# Altium PCB S1-MAIN-20201205.PcbDoc
Units mm, origin at the board's own origin, x right, y up, seen from the top; angles counter-clockwise.
Board outline 53 x 104 mm, 2 copper layers (Top Layer, Bottom Layer); 102 components, 68 nets, 290 pads, 172 vias.
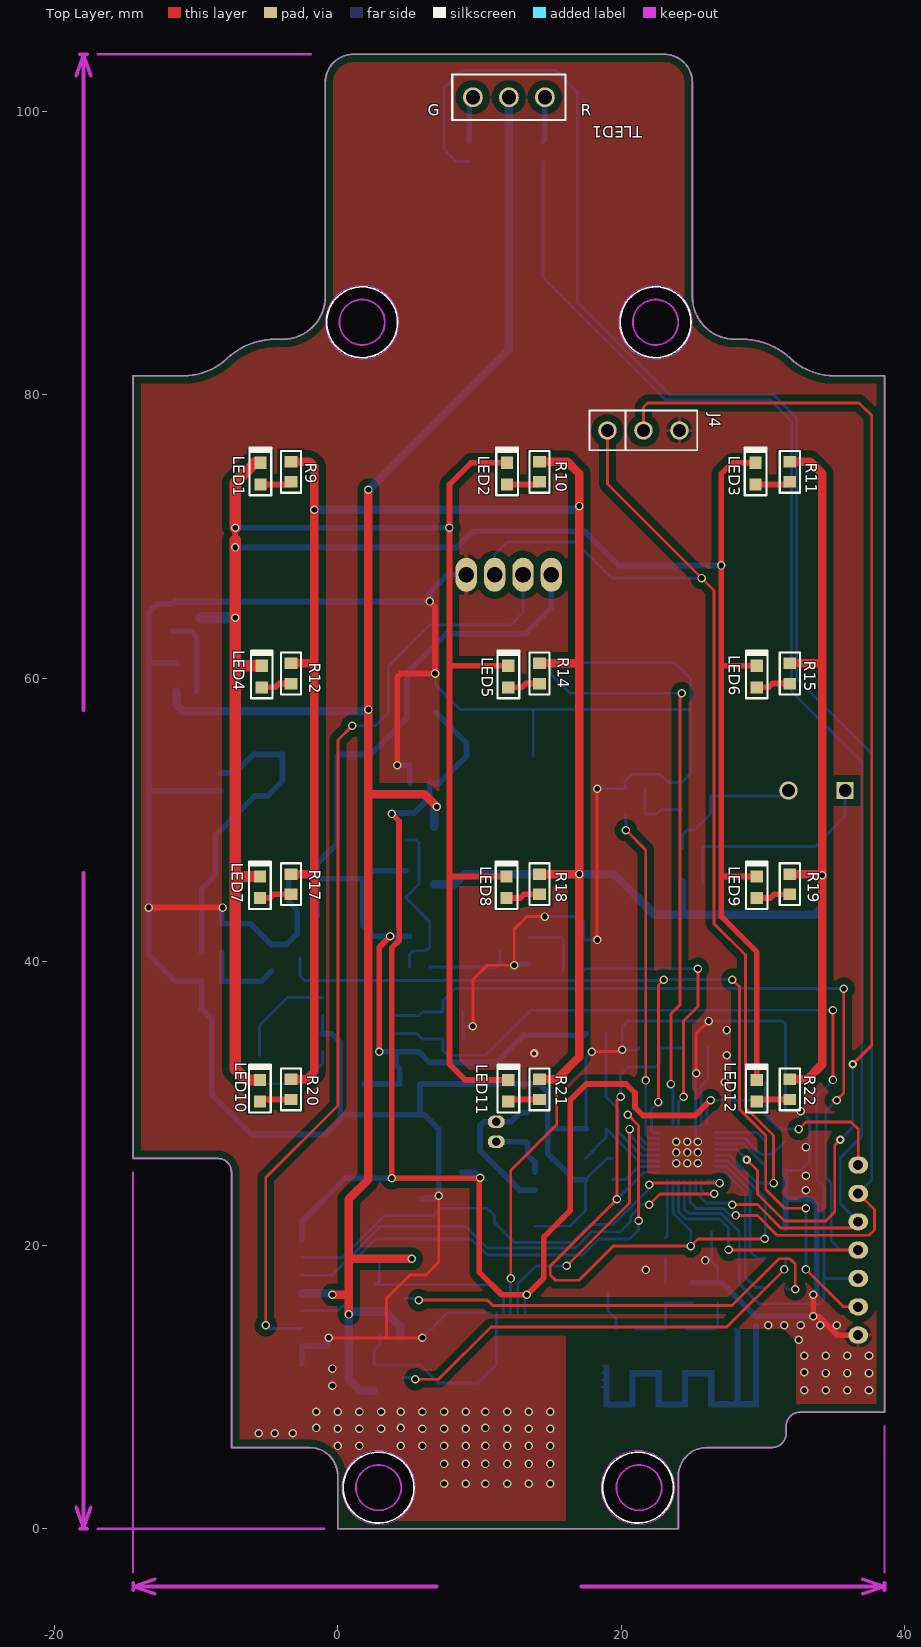
[diagram p0: Top Layer view]
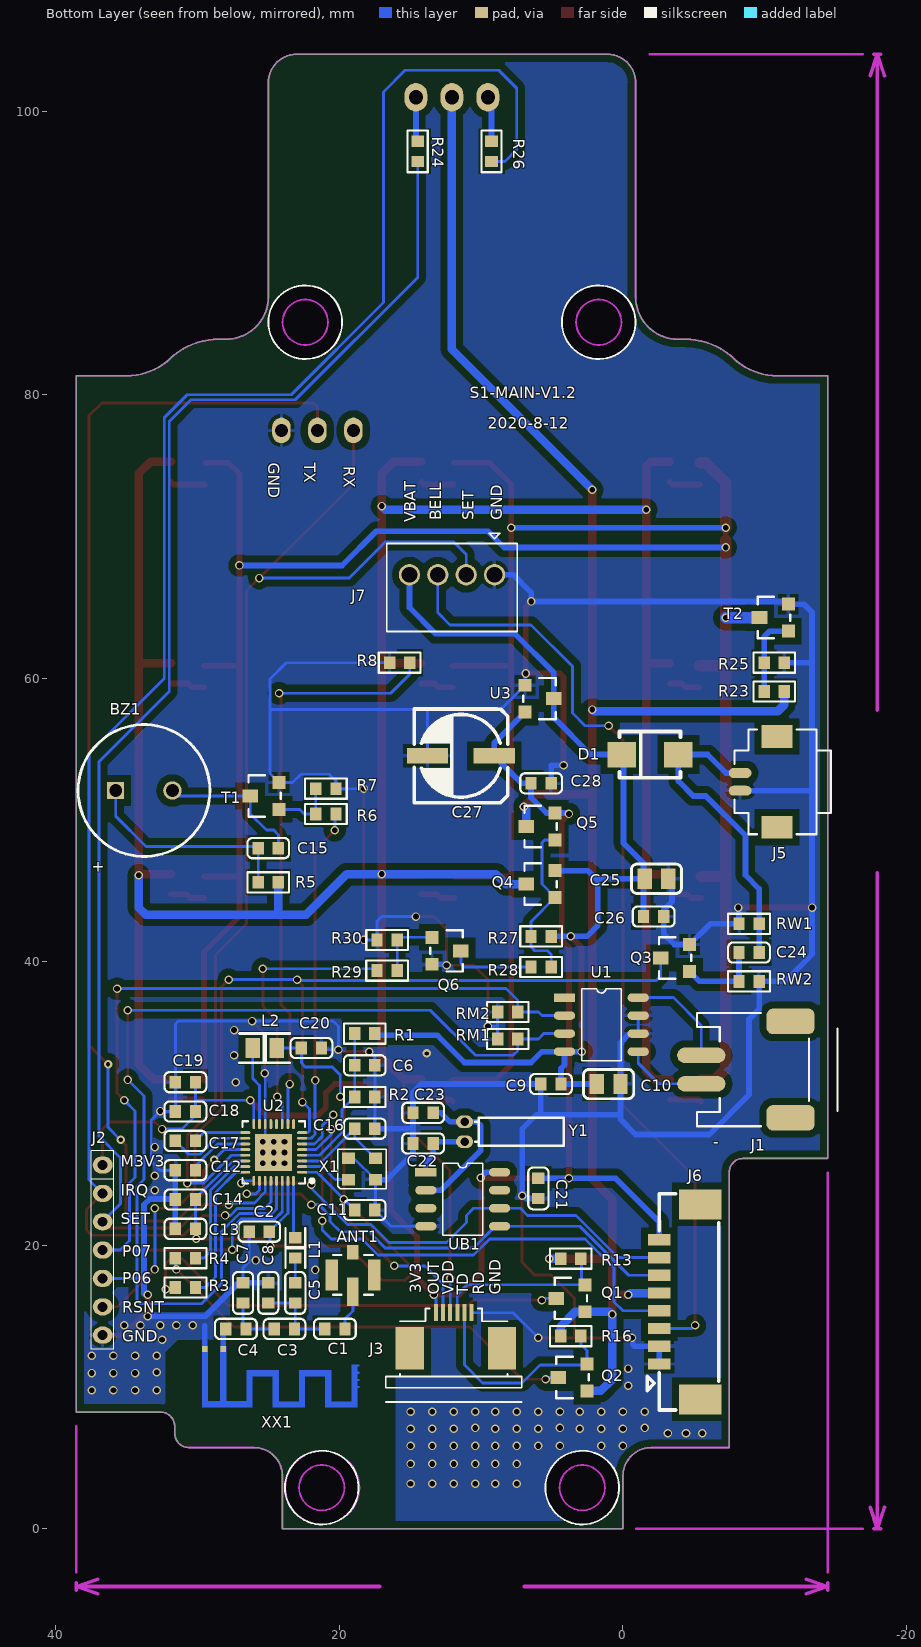
[diagram p1: Bottom Layer view, seen from below]
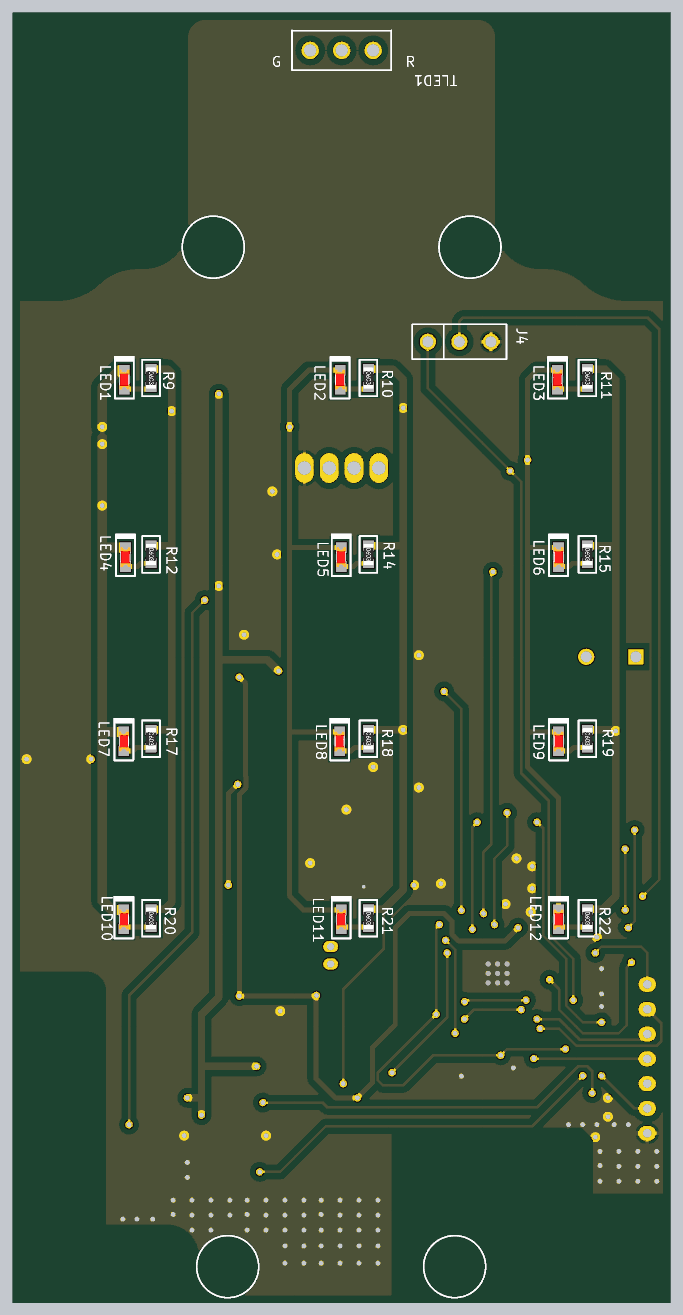
[diagram p2: 3D render of the assembled board from above, using the file's embedded part models]
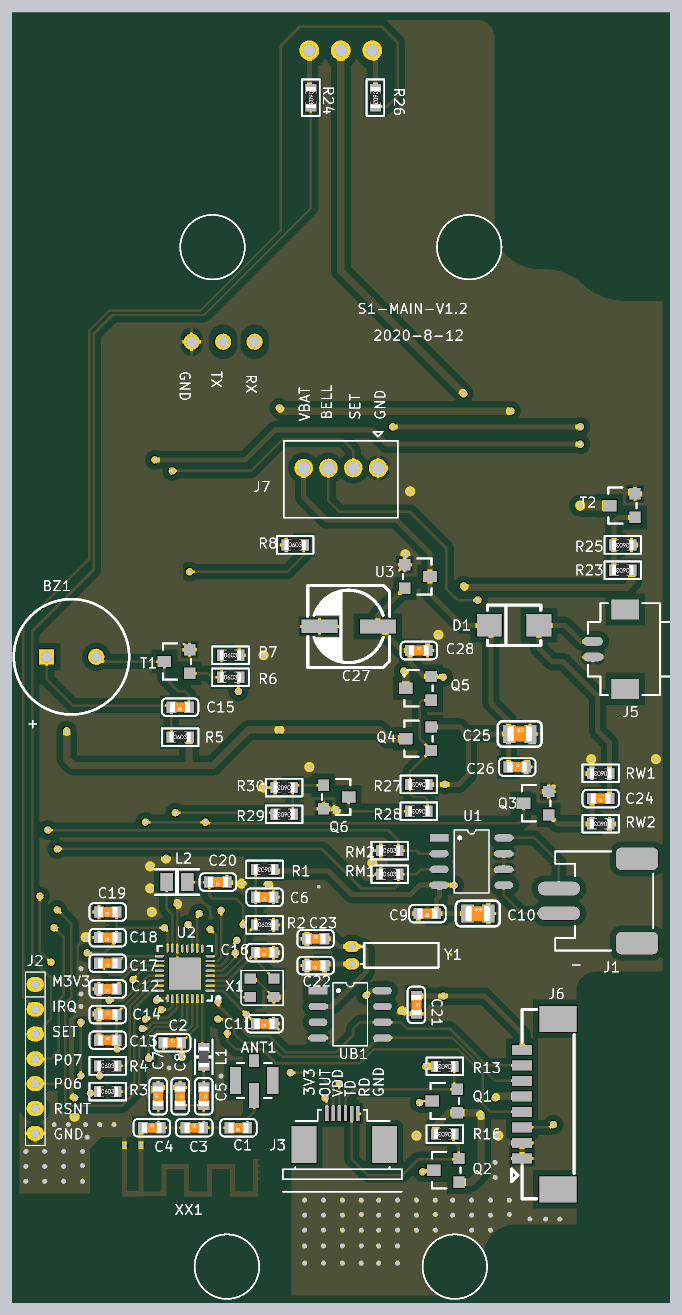
[diagram p3: 3D render of the assembled board from below, using the file's embedded part models]

## Layer stack, top to bottom
Top Layer: signal copper 0.0356
Dielectric: dielectric 0.32, FR-4, Dk 4.8
Bottom Layer: signal copper 0.0356

## Board outline
-7.5,5.727 -7.5,25.12 ccw(c-8.47,25.15) -8.44,26.12 -14.44,26.12 -14.44,81.325 -10.89,81.325 ccw(c-10.89,85.825) -7.809,82.544 cw(c-4.386,78.9) -4.386,83.9 -3.89,83.9 ccw(c-3.89,86.9) -0.89,86.9 -0.89,102 cw(c1.11,102) 1.11,104 23.01,104 cw(c23.01,102) 25.01,102 25.01,86.9 ccw(c28.01,86.9) 28.01,83.9 28.506,83.9 cw(c28.506,78.9) 31.929,82.544 ccw(c35.01,85.825) 35.01,81.325 38.56,81.325 38.56,8.227 32.62,8.227 ccw(c32.62,7.227) 31.62,7.227 31.62,6.727 cw(c30.62,6.727) 30.62,5.727 26.02,5.727 ccw(c26.02,3.727) 24.02,3.727 24.02,0 0,0 0,3.727 ccw(c-2,3.727) -2,5.727
cut-out: 25.01,85.1 ccw(c22.41,85.1) 22.41,87.7 ccw(c22.41,85.1) 19.81,85.1 ccw(c22.41,85.1) 22.41,82.5 ccw(c22.41,85.1)
cut-out: 4.31,85.1 ccw(c1.71,85.1) 1.71,87.7 ccw(c1.71,85.1) -0.89,85.1 ccw(c1.71,85.1) 1.71,82.5 ccw(c1.71,85.1)
cut-out: 23.772,2.899 ccw(c21.172,2.899) 21.172,5.499 ccw(c21.172,2.899) 18.572,2.899 ccw(c21.172,2.899) 21.172,0.299 ccw(c21.172,2.899)
cut-out: 5.473,2.899 ccw(c2.873,2.899) 2.873,5.499 ccw(c2.873,2.899) 0.273,2.899 ccw(c2.873,2.899) 2.873,0.299 ccw(c2.873,2.899)

## Design rules (kind name [scope] priority, off if disabled: settings)
Clearance [All] p1 off: gap=0.5
Clearance Clearance_1 [All] p2: gap=0.152
ComponentClearance [All] p1: gap=0 collisioncheckmode=3 verticalgap=0 showdistances=FALSE
HoleToHoleClearance [All] p1: gap=0 allowstackedmicrovias=TRUE
MinimumSolderMaskSliver [All] p1: minsoldermaskwidth=0
PolygonConnect PolygonConnect_1 [IsVia] p1: connectstyle=Direct reliefconductorwidth=0.254 reliefentries=4 polygonreliefangle="90 Angle" airgapwidth=0.254
PolygonConnect [All] p2: connectstyle=Relief reliefconductorwidth=0.254 reliefentries=4 polygonreliefangle="90 Angle" airgapwidth=0.254
RoutingVias [All] p1: holewidth=0.711 width=1.27 viastyle="Through Hole" minholewidth=0.3 minwidth=0.5 maxholewidth=0.711 maxwidth=1.27
ShortCircuit [All] p1: allowed=TRUE
SilkToSilkClearance [All] p1: silktosilkclearance=0
SilkToSolderMaskClearance SilkscreenOverComponentPads [IsPad] p1: minsilkscreentomaskgap=0 clearancetoexposedcopper=TRUE
SolderMaskExpansion [All] p1: expansion=0.102
Width [All] p1: maxlimit=2.032 minlimit=0.152 preferedwidth=0.254
22 further rules are at their usual default settings.

## Components (designator, comment, footprint, x,y, rotation, side; value= is the part's Value field where it differs from the comment)
ANT1 "ANT" ANT 19.05,17.907 r180 bottom
BZ1 "BUZZER" BUZZER_D93_L40 33.782,52.07 r180 bottom
C1 "NC_R0" 0603C 20.32,14.097 r0 bottom
C2 "1uF/6.3V" 0603C 25.654,20.955 r180 bottom
C3 "0R" 0603C 23.876,14.097 r180 bottom
C4 "0R" 0603C 27.305,14.097 r180 bottom
C5 "1.5pF" 0603C 23.114,16.637 r270 bottom
C6 "1nF" 0603C 18.214,32.69 r0 bottom
C7 "NC" 0603C 26.797,16.637 r90 bottom
C8 "1pF" 0603C 25.019,16.637 r270 bottom
C9 "0.1uF" 0603C 5.08,31.369 r0 bottom
C10 "22uF" 0805C 1.016,31.369 r180 bottom
C11 "0.1uF" 0603C 18.214,22.479 r0 bottom
C12 "0.1uF" 0603C 30.861,25.291 r0 bottom
C13 "1uF" 0603C 30.861,21.155 r180 bottom
C14 "0.1uF" 0603C 30.861,23.223 r180 bottom
C15 "10uF/10V" 0603C 25.019,48.006 r0 bottom
C16 "2.7pF" 0603C 18.214,28.219 r0 bottom
C17 "0.1uF" 0603C 30.861,27.359 r0 bottom
C18 "0.1uF" 0603C 30.861,29.428 r0 bottom
C19 "10uF/6.3V" 0603C 30.861,31.496 r0 bottom
C20 "10uF/6.3V" 0603C 21.971,33.909 r0 bottom
C21 "0.1uF" 0603C 5.969,24.003 r270 bottom
C22 "22pF" 0603C 14.097,27.178 r0 bottom
C23 "22pF" 0603C 14.097,29.337 r180 bottom
C24 "10uF/10V" 0603C -8.89,40.64 r0 bottom
C25 "10uF/16V" 0805C -2.362,45.847 r180 bottom
C26 "100nF" 0603C -2.159,43.18 r180 bottom
C27 "220uF/10V" CAP-SMD_6.3*5.8 11.43,54.518 r0 bottom
C28 "100nF" 0603C 5.775,52.578 r180 bottom
D1 "SS14" LC-SMAF_S1 -1.905,54.61 r180 bottom
J1 "电机接口" S2B-PH-SM3-TB -6.223,32.385 r90 bottom locked
J2 "7P" 7P-2.0MM 36.703,25.654 r270 bottom locked
J3 "指纹串口" 6P-0.5MM_1 11.938,15.24 r180 bottom locked
J4 "Header 3" 3P-2.54MM 19.013,77.47 r0 top
J5 "应急接口" 2P-1.25mm -8.26,52.685 r90 bottom locked
J6 "Header 8" 8P-1.25MM -4,16 r90 bottom
J7 "后板端口" JC20-4P 12.06,67.29 r180 bottom locked
L1 "2nH" 0603L 23.114,19.812 r90 bottom
L2 "4.7uH" 0805L 25.273,33.909 r0 bottom
LED1 "BLUE" 0603LED -5.461,74.422 r90 top locked
LED2 "BLUE" 0603LED 11.938,74.422 r90 top locked
LED3 "BLUE" 0603LED 29.464,74.422 r90 top locked
LED4 "BLUE" 0603LED -5.371,60.106 r90 top locked
LED5 "BLUE" 0603LED 12.028,60.106 r90 top locked
LED6 "BLUE" 0603LED 29.554,60.106 r90 top locked
LED7 "BLUE" 0603LED -5.498,45.247 r90 top locked
LED8 "BLUE" 0603LED 11.901,45.247 r90 top locked
LED9 "BLUE" 0603LED 29.554,45.247 r90 top locked
LED10 "BLUE" 0603LED -5.498,30.896 r90 top locked
LED11 "BLUE" 0603LED 12.028,30.896 r90 top locked
LED12 "BLUE" 0603LED 29.554,30.896 r90 top locked
Q1 "BSS123W" "SOT-23 - GDS" 3.683,16.256 r90 bottom
Q2 "BSS123W" "SOT-23 - GDS" 3.556,10.668 r90 bottom
Q3 "PMBT3904" "SOT-23 - BCE" -3.683,40.259 r90 bottom
Q4 "SI2301" "SOT-23 - GDS" 5.801,45.466 r90 bottom
Q5 "SI2301" "SOT-23 - GDS" 5.801,49.53 r90 bottom
Q6 "PMBT3904" "SOT-23 - BCE" 12.446,40.767 r270 bottom
R1 "510K%1" 0603R 18.214,34.925 r0 bottom
R2 "100K%1" 0603R 18.214,30.455 r180 bottom
R3 "10R" 0603R 30.861,17.018 r180 bottom
R4 "10R" 0603R 30.861,19.086 r180 bottom
R5 "10R" 0603R 25.019,45.593 r180 bottom
R6 "200R" 0603R 20.955,50.419 r180 bottom
R7 "10K" 0603R 20.955,52.197 r180 bottom
R8 "10K" 0603R 15.748,61.087 r180 bottom
R9 "560R" 0603R -3.302,74.549 r270 top
R10 "560R" 0603R 14.224,74.549 r270 top
R11 "560R" 0603R 31.877,74.549 r270 top
R12 "560R" 0603R -3.302,60.325 r270 top
R13 "10K" 0603R 3.683,19.05 r0 bottom
R14 "560R" 0603R 14.224,60.325 r270 top
R15 "560R" 0603R 31.877,60.325 r270 top
R16 "10K" 0603R 3.683,13.589 r0 bottom
R17 "560R" 0603R -3.302,45.466 r270 top
R18 "560R" 0603R 14.224,45.466 r270 top
R19 "560R" 0603R 31.877,45.466 r270 top
R20 "560R" 0603R -3.302,30.988 r270 top
R21 "560R" 0603R 14.224,30.988 r270 top
R22 "560R" 0603R 31.877,30.988 r270 top
R23 "1K" 0603R -10.668,59.055 r0 bottom
R24 "200R" LC-0603_R 14.478,97.155 r270 bottom
R25 "10K" 0603R -10.668,61.087 r0 bottom
R26 "200R" LC-0603_R 9.271,97.155 r270 bottom
R27 "100K" LC-0603_R 5.775,41.783 r0 bottom
R28 "1K" LC-0603_R 5.775,39.624 r0 bottom
R29 "4.7K" LC-0603_R 16.637,39.37 r0 bottom
R30 "10K" LC-0603_R 16.637,41.529 r0 bottom
RM1 "10K" 0603R 8.128,34.544 r180 bottom
RM2 "10K" 0603R 8.128,36.449 r180 bottom
RW1 "100K" LC-0603_R -8.89,42.672 r0 bottom
RW2 "100K" LC-0603_R -8.89,38.608 r0 bottom
T1 "SS8050" SOT-23-3L 25.273,51.689 r90 bottom
T2 "SS8050" SOT-23-3L -10.643,64.262 r90 bottom
TLED1 "F5" F5_DIP2 12.065,100.965 r180 top locked
U1 "CP2117" SOP8 1.524,35.56 r180 bottom
U2 "BK3431Q" QFN32_4*4*0.4 24.638,26.543 r0 bottom
U3 "HT7533-1" SOT-23-3L 5.894,58.547 r270 bottom
UB1 "PCF8563" SOP8 11.303,23.241 r180 bottom
X1 "16MHZ" XTAL3225 18.415,25.378 r180 bottom
XX1 "TIANX" BT_NAMI 28.189,12.68 r0 bottom locked
Y1 "32.768KHZ" 晶振-9 11.176,28.702 r270 bottom

## Footprints (in the part's own frame and the unit in brackets; to place one, negate y for a bottom-side part, rotate by r counter-clockwise, add the part's x,y. Pads: shape width x height; smd on the part's side, far side on the other; paste and mask are expansions set on the pad)
2P-1.25mm [mm]
  oval 0.7x1.6 smd mask+0.05: 1(-0.625,0) 2(0.625,0)
  rect 1.6x2.2 smd mask+0.05: 3(-3.2,-2.6) 4(3.2,-2.6)
  silkscreen extent -3.7,-6.4 3.7,0.4
3P-2.54MM [mm]
  round 1.3 / inner round 1.3 / far side oval 1.3x1.8 hole 0.9: 1(0,0) 2(2.54,0) 3(5.08,0)
  silkscreen extent -1.26,-1.4 6.34,1.4
6P-0.5MM_1 [mm]
  rect 0.28x1.2 smd: 1(-1.25,0) 2(-0.75,0) 3(-0.25,0) 4(0.25,0) 5(0.75,0) 6(1.25,0)
  rect 2x3 smd: 7(-3.1,-2.5) 8(3.4,-2.5)
  silkscreen extent -4.8,-6.3 4.8,0.3
7P-2.0MM [mm]
  oval 1.2x1.4 hole 0.7 mask+0.05: 1(0,0) 2(2,0) 3(4,0) 4(6,0) 5(8,0) 6(10,0) 7(12,0)
  silkscreen extent -1,-0.8 13,0.8
8P-1.25MM [mil]
  rect 31.5x63 smd: 1(-172.25,57.09) 2(-123.05,57.09) 3(-73.85,57.09) 4(-24.65,57.09) 5(24.65,57.09) 6(73.85,57.09) 7(123.05,57.09) 8(172.25,57.09)
  rect 82.68x118.11 smd: 9(-270.67,-57.08) 10(270.67,-57.08)
  silkscreen extent -300,-108 300,91
0603C [mm]
  rect 0.8x0.9 smd: 1(-0.711,0) 2(0.711,0)
  silkscreen extent -1.47,-0.71 1.47,0.71, body extent -0.8,-0.4 0.8,0.4, height 0.3
0603L [mm]
  rect 0.8x0.9 smd: 1(-0.711,0) 2(0.711,0)
  silkscreen extent -1.4,-0.7 1.4,0.7, body extent -0.82,-0.41 0.82,0.41, height 0.46
0603LED [mil]
  rect 34x34 smd: 1(-30,0) 2(30,0)
  silkscreen extent -60,-30 72,30, body extent -31,-16 31,16, height 24
0603R [mm]
  rect 0.8x0.9 smd: 1(-0.711,0) 2(0.711,0)
  silkscreen extent -1.47,-0.71 1.47,0.71, body extent -0.85,-0.4 0.85,0.4, height 0.56
0805C [mil]
  rect 40x56 smd: 1(-33,0) 2(33,0)
  silkscreen extent -70,-41 70,41, body extent -39,-25 39,25, height 30
0805L [mil]
  rect 40x56 smd: 1(-33,0) 2(33,0)
  silkscreen extent -70,-41 70,41
ANT [mm]
  rect 0.8x2 smd: 1(0,-1.2)
  rect 0.9x2.2 smd: 2(-1.5,0) 3(1.5,0)
  rect 0.8x1 smd: 4(0,1.6)
  silkscreen extent -1.4,-1.4 1.4,1.4
BT_NAMI [mm]
  rect 0.4x0.4 smd: 1(0,0) 2(1.3,0)
  Top Layer region: 1.5,-0.18 1.098,-0.18 1.098,4.116 1.5,4.116
  Top Layer region: 0.2,-0.197 -0.203,-0.197 -0.203,4.1 0.2,4.1
  Top Layer region: -2.05,3.703 -2.05,4.104 0.199,4.104 0.199,3.703
  Top Layer region: -1.651,1.512 -2.053,1.512 -2.053,4.101 -1.651,4.101
  Top Layer region: -0.208,3.695 -0.208,4.11 1.495,4.11 1.495,3.695
  Top Layer region: -3.899,1.51 -3.899,1.911 -1.65,1.911 -1.65,1.51
  Top Layer region: -3.5,1.512 -3.902,1.512 -3.902,4.101 -3.5,4.101
  Top Layer region: -5.751,3.704 -5.751,4.106 -3.502,4.106 -3.502,3.704
  Top Layer region: -7.609,1.506 -7.609,1.907 -5.359,1.907 -5.359,1.506
  Top Layer region: -5.35,1.51 -5.752,1.51 -5.752,4.103 -5.35,4.103
  Top Layer region: -7.202,1.51 -7.604,1.51 -7.604,4.106 -7.202,4.106
  Top Layer region: -9.45,3.704 -9.45,4.106 -7.201,4.106 -7.201,3.704
  Top Layer region: -9.048,1.106 -9.45,1.106 -9.45,4.108 -9.048,4.108
  Top Layer region: -9.574,1.732 -9.135,1.732 -9.135,1.619 -9.574,1.619
  Top Layer region: -9.573,2.239 -9.136,2.239 -9.136,2.126 -9.573,2.126
  Top Layer region: -9.571,2.745 -9.135,2.745 -9.135,2.632 -9.571,2.632
  Top Layer region: -9.578,1.22 -9.136,1.22 -9.136,1.107 -9.578,1.107
BUZZER_D93_L40 [mm]
  rect 1.2x1.2 hole 0.9: 1(-2,0)
  round 1.3 hole 0.9: 2(2,0)
  silkscreen extent -4.65,-4.65 4.65,4.65
CAP-SMD_6.3*5.8 [mm]
  rect 2.9x1.1 smd: 1(-2.35,0.005) 2(2.35,-0.005)
  silkscreen extent -3.3,-3.3 3.3,3.3
F5_DIP2 [mm]
  round 1.4 / inner oval 1.6x2 / far side oval 1.6x2 hole 1 mask+0.05: 1(0,0) 2(-2.54,0) 3(2.54,0)
  silkscreen extent -4,-1.6 4,1.6
JC20-4P [mm]
  round 1.5 / inner round 1.5 / far side oval 1.5x2.4 hole 1.1 mask+0.05: 1(3,0) 2(1,0) 3(-1,0) 4(-3,0)
  silkscreen extent -4.6,-4 4.6,2.92
LC-0603_R [mm]
  rect 0.8x0.9 smd: 1(-0.711,0) 2(0.711,0)
  silkscreen extent -1.47,-0.71 1.47,0.71, body extent -0.85,-0.4 0.85,0.4, height 0.56
LC-SMAF_S1 [mm]
  rect 2x1.8 smd: 1(2,0) 2(-2,0)
  silkscreen extent -2.15,-1.63 2.15,1.63
QFN32_4*4*0.4 [mm]
  rect 2.6x2.6 smd paste-0.025 mask+0.051: 0(0,0)
  oval 0.7x0.2 smd paste-0.025 mask+0.051: 1(-2,1.4) 2(-2,1) 3(-2,0.6) 4(-2,0.2) 5(-2,-0.2) 6(-2,-0.6) 7(-2,-1) 8(-2,-1.4) 17(2,-1.4) 18(2,-1) 19(2,-0.6) 20(2,-0.2) 21(2,0.2) 22(2,0.6) 23(2,1) 24(2,1.4)
  oval 0.2x0.7 smd paste-0.025 mask+0.051: 9(-1.4,-2) 10(-1,-2) 11(-0.6,-2) 12(-0.2,-2) 13(0.2,-2) 14(0.6,-2) 15(1,-2) 16(1.4,-2) 25(1.4,2) 26(1,2) 27(0.6,2) 28(0.2,2) 29(-0.2,2) 30(-0.6,2) 31(-1,2) 32(-1.4,2)
  silkscreen extent -2.82,-2.2 2.2,2.2
S2B-PH-SM3-TB [mm]
  oval 1.1x3.4 smd mask+0.05: 1(-1,0.7)
  oval 1.1x3.4 smd paste+0 mask+0.05: 2(1,0.7)
  rrect50% 1.8x3.4 smd mask+0.05: A(-3.4,-5.6) B(3.4,-5.6)
  silkscreen extent -4,-8.9 4,1
SOP8 [mm]
  rect 1.5x0.6 smd mask+0.05: 1(-2.6,1.905)
  oval 1.5x0.6 smd mask+0.05: 2(-2.6,0.635) 3(-2.6,-0.635) 4(-2.6,-1.905) 5(2.6,-1.905) 6(2.6,-0.635) 7(2.6,0.635) 8(2.6,1.905)
  round 0.4 on Bottom Overlay mask+0.05: ""(-0.949,1.905)
  silkscreen extent -1.4,-2.54 1.4,2.54
"SOT-23 - BCE" [mil]
  rect 36x36 smd: B(-37.4,-40) E(37.4,-40)
  rect 36x43.31 smd: C(0,40)
  silkscreen extent -57,-45 58,45
"SOT-23 - GDS" [mil]
  rect 36x43.31 smd: D(0,40)
  rect 36x36 smd: G(-37.4,-40) S(37.4,-40)
  silkscreen extent -57,-45 58,45
SOT-23-3L [mil]
  rect 36x36 smd: 1(-37.4,-40) 2(37.4,-40)
  rect 36x43.31 smd: 3(0,40)
  silkscreen extent -57,-45 58,45
XTAL3225 [mm]
  rect 0.9x0.8 smd: 1(-0.95,-0.75) 2(0.95,-0.75) 3(0.95,0.75) 4(-0.95,0.75)
  silkscreen extent -1.7,-1.4 1.7,1.4
晶振-9 [mm]
  oval 0.9x1.2 hole 0.6: 1(0,0) 2(1.4,0)
  rect 0x0 smd: 3(0.635,8)
  silkscreen extent -0.3,0.76 1.7,7

## Part data
ANT1: library part Socket, "Socket"
BZ1: "Buzzer"
C1 C2 C3 C4 C5 C7 C8 C11 C12 C13 C14 C16 C17 C18 C19 C20: library part Cap, "Capacitor"
C6 C9 C10 C24 C28: library part CAP-NP, "Capacitor, Ceramic"
C15: library part C_0_Dup1
C21 C22 C23: library part C
C25 C27: library part CAP-P, "Capacitor, tolerance ±20%"
C26: library part "CAP NP"
D1: library part D
J1: library part MHDR1X2, "Header, 2-Pin"
J3: library part "Header 6", "Header, 6-Pin"
J4: "Header, 3-Pin"
J5: library part "Header 2", "Header, 2-Pin"
J6: "Header, 8-Pin"
J7: library part "Header 4H", "Header, 4-Pin, Right Angle"
L1 L2: "Power Inductor, 4.7uH, 0.7A, 260mR DCR"
LED1 LED2 LED3 LED4 LED5 LED6 LED7 LED8 LED9 LED10 LED11 LED12: library part LED
Q1 Q2: library part BSS123L_0
Q4 Q5: library part PWRMOSFET_EP_DGS_0
R1 R2 R8: library part Res2, "Resistor"
R3 R4 R5 R6 R7: library part R_Dup1
R9 R10 R11 R12 R14 R15 R17 R18 R19 R20 R21 R22 R23 R24 R25 R26 R27 R28 R29 R30 RW1 RW2: library part R
R13 R16: library part RES
RM1 RM2: library part Pro71C3.TMP_UnNamed_1
T1 T2: library part NPN_BJT, "Bipolar Junction Transistor"
TLED1: library part WWXMFGLY
U1: library part AM24LC02_0
U3: library part XC6206P302M
UB1: library part IC8
Y1: library part 晶振

## Via types
v1: diameter 0.6, hole 0.4, Top Layer to Bottom Layer, 85 vias
v2: diameter 0.6, hole 0.4, Top Layer to Bottom Layer, tented both sides, 82 vias
v3: diameter 0.6, hole 0.3, Top Layer to Bottom Layer, 3 vias
v4: diameter 0.6, hole 0.3, Top Layer to Bottom Layer, tented both sides, 1 vias
v5: diameter 0.6, hole 0.4, Top Layer to Bottom Layer, tented bottom, 1 vias

## Nets (pads, with @x,y where several pads share a name; then routed paths per layer and width w, separated by ;. In a path a pad name is that pad's centre, name@x,y a point inside that pad or via, vN(x,y) a via of type N, cw(c..) or ccw(c..) an arc to the next point about the centre after c; other vN are vias at no path point)
ANT: ANT1.1 C1.1 | length 2.8
  Bottom Layer w0.2: ANT1.1 19.05,15.367 19.609,14.808 C1.1
BAT_ADC: C6.2 R1.2 R2.1 U2.4 | length 10.8
  Bottom Layer w0.2: R1.2 C6.2 R2.1 19.812,29.567 19.812,27.94 21.409,26.343 U2.4
BEEP: R6.2 U2.7 | length 24.2
  Top Layer w0.2: v1(20.32,49.276) 21.717,47.879 v1(21.717,31.623)
  Bottom Layer w0.2: R6.2 20.32,50.343 v1(20.32,49.276) ; v1(21.717,31.623) 21.717,27.813 21.987,27.543 U2.7
BELL: J6.3 J7.3 | length 67.5
  Top Layer w0.2: v1(-5.08,14.351) -5.08,24.765 0,29.845 0,55.626 v1(1.016,56.642)
  Bottom Layer w0.2: v1@-5.021,14.41 v1(-5.08,14.351) -4.853,14.124 J6.3 ; v1(1.016,56.642) 2.667,56.642 3.556,57.531 3.556,60.833 6.477,63.754 12.192,63.754 13.06,64.622 J7.3
GND: C2.1 C6.1 C7.2 C8.1 C9.2 C10.2 C11.1 C12.2 C13.1 C14.1 C16.1 C18.2 C19.2 C20.1 C21.2 C22.2 C23.1 C25.2 C26.2 C27.2 C28.2 J2.7 J3.6 J4.3 J5.1 J6.1 J6.2 J7.1 Q3.E Q6.E R2.2 R7.2 R8.1 R25.1 R30.2 RM1.1 RM2.1 RW1.2 RW2.1 T1.2 T2.2 U1.6 U1.7 U2.14 U3.1 UB1.4 X1.2 X1.4 XX1.2 | length 346.4
  Top Layer w0.2: v1(-0.635,13.462) 3.429,13.462 ; v1(5.969,13.462) 3.429,13.462 ; v1(7.112,23.495) 7.112,18.796 6.223,17.907 5.08,17.907 3.429,16.256 3.429,13.462 ; v1(9.525,35.433) 9.525,38.735 10.541,39.751 v1(12.446,39.751) 12.446,42.291 13.335,43.18 v1(14.605,43.18) ; v1(17.907,33.655) 19.939,33.655 v1(20.066,33.782) ; v1(18.288,41.529) v1(18.288,52.197) ; v1(25.273,32.131) 25.273,34.925 v1(26.162,35.814)
  Top Layer w0.4: v1(-13.335,43.815) v1(-8.128,43.815) ; v1(4.191,53.848) 4.191,60.071 4.445,60.325 v1(6.858,60.325) 6.858,65.024 v1(6.477,65.405) ; v1(33.528,16.51) v1(33.528,14.986) 33.909,14.986 35.241,13.654 J2.7
  Bottom Layer w0.2: U1.6 U1.7 ; v1@-0.687,13.41 v1(-0.635,13.462) ; v1(5.969,13.462) 7.747,15.24 J3.6 ; v1(6.858,60.325) 6.91,60.273 U3.1 8.622,57.785 13.843,57.785 ; v1(7.112,23.495) v1@7.112,23.622 ; RM1.1 8.839,35.433 ; RM2.1 8.839,35.433 ; v1(9.525,35.433) 8.839,35.433 ; C27.2 13.78,57.722 13.843,57.785 ; UB1.4 16.359,21.336 C11.1 17.465,22.516 X1.2 18.965,26.128 X1.4 ; v1(14.605,43.18) 17.018,43.18 17.348,42.85 R30.2 v1(18.288,41.529) ; R8.1 23.749,61.087 24.892,59.944 24.892,57.658 ; C16.1 R2.2 C6.1 17.502,33.25 v1(17.907,33.655) ; v1(18.288,52.197) R7.2 20.244,52.756 20.701,53.213 22.733,53.213 23.307,52.639 T1.2 24.892,53.274 24.892,57.658 ; C20.1 21.133,33.782 v1(20.066,33.782) 20.066,35.433 20.447,35.814 v1(26.162,35.814) 31.369,35.814 31.572,35.611 C19.2 C18.2 32.603,29.428 v1(32.639,29.464) 33.274,28.829 33.274,25.908 32.639,25.273 31.59,25.273 C12.2 ; v1(25.273,32.131) 25.238,32.096 U2.14 25.238,27.467 v2(25.4,27.305) ; C2.1 26.365,18.847 26.797,18.415 C7.2 ; 29.464,14.351 29.489,14.326 ; 29.464,14.986 29.489,14.961 ; 13.843,57.785 24.765,57.785 24.892,57.658
  Bottom Layer w0.4: R25.1 -13.335,61.087 ; J5.1 -13.335,52.06 ; v1(-8.128,43.815) -8.179,43.764 RW1.2 -6.162,42.672 Q3.E -3.622,41.209 -2.87,41.961 C26.2 -2.87,43.637 -3.454,44.221 C25.2@-3.454,45.72 ; J6.1 J6.2 -0.81,12.875 -0.687,12.997 v1@-0.687,13.41 ; U1.6 -0.457,34.925 0.178,34.29 C10.2 0.178,29.21 ; v1(4.191,53.848) 5.064,53.848 C28.2 ; C21.2 6.782,23.292 ; v1@7.112,23.622 7.112,28.194 6.096,29.21 5.791,29.21 ; J7.1 7.727,67.29 6.477,66.04 v1(6.477,65.405) -11.466,65.405 T2.2 -12.766,65.212 -13.335,64.643 -13.335,61.087 ; v1(12.446,39.751) 12.512,39.817 Q6.E ; X1.2 16.647,24.628 14.808,26.467 C22.2 14.808,28.258 ; C16.1 14.846,28.219 14.808,28.258 ; C8.1 C7.2 27.102,17.348 29.464,14.986 v1(33.528,14.986) ; XX1.2 29.489,14.326 ; C13.1 C14.1 ; C12.2 C14.1 ; v1(33.528,16.51) 33.711,16.51 33.782,16.581 33.782,22.86 33.384,23.258 31.608,23.258 C14.1 ; -13.335,52.06 v1(-13.335,43.815) -13.335,40.513 -11.43,38.608 RW2.1 -9.601,36.652 -8.89,35.941 -8.89,30.607 -6.096,27.813 -0.889,27.813 0.178,28.88 0.178,29.21 ; -13.335,52.06 -13.335,61.087 ; 0.178,29.21 5.791,29.21 ; 5.791,29.21 C9.2 14.224,31.369 14.808,30.785 C23.1 14.808,28.258
  other v1: 27.305,31.496 27.432,33.401 27.432,35.179
  other v2: 7.493,3.175 9.017,3.175 10.414,3.175 11.938,3.175 13.462,3.175 14.986,3.175 7.493,4.572 9.017,4.572 10.414,4.572 11.938,4.572 13.462,4.572 14.986,4.572 0,5.842 1.524,5.842 4.445,5.842 5.969,5.842 7.493,5.842 9.017,5.842 10.414,5.842 11.938,5.842 13.462,5.842 14.986,5.842 -5.588,6.731 -4.445,6.731 -3.175,6.731 0,7.048 1.524,7.048 3.048,7.048 5.969,7.048 7.493,7.048 9.017,7.048 11.938,7.048 13.462,7.048 14.986,7.048 -1.524,7.112 4.445,7.112 10.414,7.112 -1.524,8.255 0,8.255 1.524,8.255 3.048,8.255 4.445,8.255 5.969,8.255 7.493,8.255 9.017,8.255 10.414,8.255 11.938,8.255 13.462,8.255 14.986,8.255 32.893,9.779 34.417,9.779 35.941,9.779 37.465,9.779 -0.381,10.096 34.417,10.985 35.941,10.985 37.465,10.985 32.893,11.049 -0.381,11.303 32.893,12.192 34.417,12.192 35.941,12.192 37.465,12.192 30.353,14.351 31.496,14.351 32.639,14.351 34.036,14.351 35.179,14.351 21.717,18.253 25.908,18.923 33.02,23.876 33.02,24.892 23.876,25.781 24.638,25.781 25.4,25.781 23.876,26.543 24.638,26.543 25.4,26.543 33.02,26.924 23.876,27.305 24.638,27.305
  other v4: 13.843,33.528
  other v5: 32.512,13.335
INT_FP: J3.2 U2.5 | length 20.4
  Top Layer w0.2: v1(16.129,18.542) 20.574,22.987 v1(20.574,28.194)
  Bottom Layer w0.2: J3.2 12.688,17.26 13.97,18.542 v1(16.129,18.542) ; v1(20.574,28.194) 20.574,27.813 21.644,26.743 U2.5
IRQ_TSM12: J6.4 U2.6 | length 40.4
  Top Layer w0.2: v1(20.447,29.21) 21.209,28.448 v1(21.209,21.717)
  Bottom Layer w0.2: J6.4 0.007,15.374 0.635,16.002 0.635,18.415 2.667,20.447 9.398,20.447 10.541,19.304 17.272,19.304 18.415,20.447 20.574,20.447 21.209,21.082 v1(21.209,21.717) ; v1(20.447,29.21) 21.209,28.448 21.209,27.686 21.752,27.143 U2.6
M3V3: C18.1 C19.1 C21.1 C27.1 C28.1 J2.1 J3.1 J6.8 Q5.S U2.16 U3.2 UB1.8 | length 113.7
  Top Layer w0.2: v1(32.512,28.194) 33.02,28.702 36.195,28.702 36.703,28.194 J2.1
  Top Layer w0.4: v1(3.81,50.419) 4.318,49.911 4.318,42.453 4.335,42.435 4.335,41.513 3.81,40.987 v1(3.81,24.714) v1@9.982,24.714 ; v1(10.033,24.765) v1@9.982,24.714 ; v1(26.289,30.226) 25.208,29.145 21.528,29.145 20.955,29.718 20.955,30.734 20.32,31.369 17.526,31.369 16.383,30.226 16.383,22.426 14.534,20.577 14.534,17.709 v1(13.335,16.51) 11.557,16.51 9.982,18.085 v1@9.982,24.714
  Bottom Layer w0.2: J3.1 13.188,16.49 13.208,16.51 v1(13.335,16.51) ; U2.16 26.038,29.975 v1(26.289,30.226) 30.15,30.226 ; C19.1 30.15,30.226 ; v1(32.512,28.194) 31.115,28.194 30.15,29.159 C18.1 30.15,30.226
  Bottom Layer w0.4: J6.8 -2.55,21.656 0.508,24.714 v1(3.81,24.714) C21.1 ; v1(3.81,50.419) 3.871,50.48 Q5.S 5.395,50.48 6.487,51.572 C28.1 7.145,52.578 C27.1 9.08,55.427 U3.2 ; UB1.8 9.652,25.146 v1(10.033,24.765)
NetBZ1_1: BZ1.1 C15.2 R5.1 | length 15.2
  Bottom Layer w0.2: R5.1 C15.2 25.857,48.133 33.655,48.133 35.782,50.26 BZ1.1
NetBZ1_2: BZ1.2 C15.1 T1.3 | length 10.5
  Bottom Layer w0.2: C15.1 24.308,48.946 24.638,49.276 25.146,49.276 26.289,50.419 T1.3 31.401,51.689 BZ1.2
NetC1_2: C1.2 C3.2 C5.2 C8.2 | length 5.9
  Bottom Layer w0.2: C1.2 C3.2 23.114,14.148 C5.2 C8.2
NetC3_1: C3.1 C4.2 C7.1 | length 3.9
  Bottom Layer w0.2: C3.1 C4.2 26.797,14.3 C7.1
NetC4_1: C4.1 XX1.1 | length 1.5
  Bottom Layer w0.2: C4.1 C4.1@28.189,13.924
  Bottom Layer w0.4: XX1.1 C4.1@28.189,13.924
NetC5_1: C5.1 L1.1 | length 1.8
  Bottom Layer w0.2: C5.1 L1.1
NetC12_1: C12.1 U2.19 | length 4.5
  Bottom Layer w0.2: U2.19 28.61,27.143 30.15,25.603 C12.1
NetC16_2: C16.2 U2.3 X1.3 | length 7.4
  Bottom Layer w0.2: X1.3 18.925,27.587 C16.2 21.201,25.943 U2.3
NetC17_1: C17.1 U2.17 | length 3.8
  Bottom Layer w0.2: U2.17 29.566,27.943 C17.1
NetC17_2: C17.2 U2.18 | length 5.8
  Bottom Layer w0.2: U2.18 28.718,27.543 29.845,26.416 30.629,26.416 C17.2
NetC22_1: C22.1 UB1.1 Y1.2 | length 4.5
  Bottom Layer w0.4: Y1.2 13.262,27.302 C22.1 13.386,26.365 13.903,25.848 UB1.1
NetC23_2: C23.2 UB1.2 Y1.1 | length 10.5
  Bottom Layer w0.4: C23.2 12.827,29.337 12.192,28.702 Y1.1 10.287,28.702 10.033,28.448 10.033,26.67 12.827,23.876 UB1.2
NetC24_2: C24.2 Q3.B RW2.2 | length 5.8
  Bottom Layer w0.4: C24.2 RW2.2 -5.4,38.608 Q3.B
NetJ1_1: J1.1 U1.5 | length 5.9
  Bottom Layer w0.2: J1.1 -2.524,31.385 -1.076,32.833 U1.5
NetJ1_2: J1.2 U1.8 | length 7.4
  Bottom Layer w0.2: J1.2 -5.523,35.498 -3.556,37.465 U1.8
NetL1_2: L1.2 U2.32 | length 4.1
  Bottom Layer w0.2: L1.2 23.238,20.647 U2.32
NetL2_2: L2.2 U2.15 | length 5.6
  Bottom Layer w0.2: U2.15 25.638,31.277 26.111,31.75 L2.2
NetLED1_1: LED1.1 R9.2 | length 2.2
  Top Layer w0.4: LED1.1 -3.48,73.66 R9.2
NetLED1_2: LED1.2 LED2.2 LED3.2 LED4.2 LED5.2 LED6.2 LED7.2 LED8.2 LED9.2 LED10.2 LED11.2 LED12.2 T2.3 | length 213.2
  Top Layer w0.4: -7.366,67.945 -7.239,67.945 ; -7.239,69.596 -7.366,69.596 -7.239,69.723 v1(-7.239,70.612) ; LED8.2 7.909,46.009 7.874,45.974 ; LED2.2 9.398,75.184 7.874,73.66 v1(7.874,70.612) 7.874,60.96 ; LED11.2 8.982,31.658 7.874,32.766 7.874,45.974 ; LED5.2 7.966,60.868 7.874,60.96 ; LED3.2 27.813,75.184 27.051,74.422 v1(27.051,67.945) 27.051,60.833 ; LED12.2 29.554,40.677 27.051,43.18 27.051,45.847 ; LED9.2 27.213,46.009 27.051,45.847 ; LED6.2 27.086,60.868 27.051,60.833 ; 7.874,45.974 7.874,60.96 ; 27.051,45.847 27.051,60.833
  Top Layer w0.8: -7.239,69.723 -7.239,69.596 v1(-7.239,69.215) -7.239,67.945 v1(-7.239,64.262) -7.239,60.833 ; v1(-7.239,70.612) -7.239,73.787 -5.842,75.184 LED1.2 ; LED10.2 -6.477,31.658 -7.239,32.42 -7.239,45.847 ; LED7.2 -7.077,46.009 -7.239,45.847 ; LED4.2 -7.204,60.868 -7.239,60.833 ; -7.239,45.847 -7.239,60.833
  Bottom Layer w0.4: v1(-7.239,69.215) 8.382,69.215 9.525,70.358 17.399,70.358 19.812,67.945 v1(27.051,67.945) ; v1(-7.239,70.612) v1(7.874,70.612)
  Bottom Layer w0.8: T2.3 v1(-7.239,64.262)
NetLED2_1: LED2.1 R10.2 | length 2.4
  Top Layer w0.4: LED2.1 14.046,73.66 R10.2
NetLED3_1: LED3.1 R11.2 | length 2.5
  Top Layer w0.4: LED3.1 31.699,73.66 R11.2
NetLED4_1: LED4.1 R12.2 | length 2.2
  Top Layer w0.4: LED4.1 -4.41,59.344 -4.14,59.614 R12.2
NetLED5_1: LED5.1 R14.2 | length 2.3
  Top Layer w0.4: LED5.1 12.989,59.344 13.259,59.614 R14.2
NetLED6_1: LED6.1 R15.2 | length 2.4
  Top Layer w0.4: LED6.1 30.388,59.344 30.658,59.614 R15.2
NetLED7_1: LED7.1 R17.2 | length 2.3
  Top Layer w0.4: LED7.1 -4.791,44.485 -4.521,44.755 R17.2
NetLED8_1: LED8.1 R18.2 | length 2.4
  Top Layer w0.4: LED8.1 12.862,44.485 13.132,44.755 R18.2
NetLED9_1: LED9.1 R19.2 | length 2.4
  Top Layer w0.4: LED9.1 30.515,44.485 30.785,44.755 R19.2
NetLED10_1: LED10.1 R20.2 | length 2.3
  Top Layer w0.4: LED10.1 -5.355,30.277 R20.2
NetLED11_1: LED11.1 R21.2 | length 2.3
  Top Layer w0.4: LED11.1 12.171,30.277 R21.2
NetLED12_1: LED12.1 R22.2 | length 2.4
  Top Layer w0.4: LED12.1 29.697,30.277 R22.2
NetQ4_G: Q4.G Q5.G R27.2 R28.1 | length 12
  Bottom Layer w0.2: Q5.G 5.522,48.58 5.715,48.387 5.715,45.466 4.785,44.536 Q4.G 6.487,42.814 R27.2 6.487,41.031 6.223,40.767 5.334,40.767 5.064,40.497 R28.1
NetQ6_B: Q6.B R29.1 R30.1 | length 4.7
  Bottom Layer w0.2: Q6.B 15.738,41.717 R30.1 R29.1
NetQ6_C: Q6.C R28.2 | length 5.9
  Bottom Layer w0.2: R28.2 11.176,39.624 11.43,39.878 Q6.C
NetR3_2: R3.2 U2.24 | length 10.4
  Bottom Layer w0.2: U2.24 27.308,25.143 28.731,23.72 28.731,17.751 29.464,17.018 R3.2
NetR4_2: R4.2 U2.23 | length 8.7
  Bottom Layer w0.2: U2.23 27.416,25.543 29.083,23.876 29.083,19.558 29.555,19.086 R4.2
NetR6_1: R6.1 R7.1 T1.1 | length 4.5
  Bottom Layer w0.2: R7.1 R6.1 22.479,50.419 22.799,50.739 T1.1
NetR23_2: R23.2 R25.2 T2.1 | length 5.7
  Bottom Layer w0.4: T2.1 -10.353,63.312 -9.957,62.916 R25.2 R23.2
NetR24_1: R24.1 TLED1.2 | length 3.2
  Bottom Layer w0.4: R24.1 14.605,97.993 TLED1.2
NetR26_1: R26.1 TLED1.3 | length 3.2
  Bottom Layer w0.4: R26.1 9.271,100.711 TLED1.3
NetU2_2: U2.2 X1.1 | length 3.7
  Bottom Layer w0.2: X1.1 20.31,24.628 21.225,25.543 U2.2
P04/LED_RED: J2.3 R24.2 U2.27 | length 103.1
  Top Layer w0.2: v1(27.813,22.86) 29.591,22.86 31.242,21.209 36.258,21.209 J2.3
  Bottom Layer w0.2: R24.2 14.478,88.265 23.114,79.629 30.48,79.629 32.004,78.105 32.004,59.055 36.957,54.102 36.957,27.686 35.433,26.162 35.433,22.924 J2.3 ; U2.27 25.238,23.749 26,22.987 27.686,22.987 v1(27.813,22.86)
P05/LED_GREEN: J2.2 R26.2 U2.28 | length 126.7
  Top Layer w0.2: v1(28.067,22.098) 29.591,22.098 30.988,20.701 37.465,20.701 37.846,21.082 37.846,22.511 J2.2
  Bottom Layer w0.2: R26.2 8.331,96.444 7.493,97.282 7.493,101.6 8.763,102.87 15.367,102.87 16.891,101.346 16.891,86.487 23.397,79.981 30.734,79.981 32.356,78.359 32.356,59.973 37.655,54.674 37.655,24.606 J2.2 ; U2.28 24.838,23.041 25.302,22.577 27.207,22.577 27.686,22.098 v1(28.067,22.098)
P06/MOTO1: J2.5 RM1.2 U1.3 U2.29 | length 73.6
  Top Layer w0.2: v1(34.925,31.658) v1(34.925,36.576)
  Bottom Layer w0.2: U1.3 5.588,34.925 5.969,34.544 RM1.2 7.417,33.731 7.747,33.401 10.414,33.401 13.589,36.576 v1(34.925,36.576) ; U2.29 24.438,22.552 24.765,22.225 27.041,22.225 28.311,20.955 28.311,17.282 29.718,15.875 34.036,15.875 34.29,16.129 34.29,17.654 ; v1(34.925,31.658) 33.782,30.515 33.782,24.638 34.29,24.13 34.29,17.654 ; J2.5 34.29,17.654
P07/MOTO0: J2.4 RM2.2 U1.2 U2.30 | length 70.8
  Top Layer w0.2: v1(27.559,19.685) 27.59,19.654 J2.4 ; v1@34.925,30.226 v1(35.179,30.226) 35.687,30.734 v1(35.687,38.1)
  Bottom Layer w0.2: U1.2 5.715,36.195 5.969,36.449 RM2.2 7.417,37.262 8.255,38.1 v1(35.687,38.1) ; U2.30 24.038,22.358 24.552,21.844 26.924,21.844 27.559,21.209 v1(27.559,19.685) ; v1@34.925,30.226 v1(35.179,30.226) 34.417,29.464 34.417,24.765 34.798,24.384 34.798,20.32 35.464,19.654 J2.4
PWR_CTL: R29.2 U2.11 | length 19.6
  Top Layer w0.2: v1(24.384,30.48) 24.384,35.814 25.4,36.83 v1(25.4,39.497)
  Bottom Layer w0.2: R29.2 17.475,39.497 v1(25.4,39.497) ; U2.11 24.038,30.134 v1(24.384,30.48)
REMOTO: R8.2 U2.10 | length 41.4
  Top Layer w0.2: v1(23.495,31.369) 23.495,36.322 24.13,36.957 24.13,58.801 v1(24.257,58.928)
  Bottom Layer w0.2: R8.2 15.037,60.274 16.383,58.928 v1(24.257,58.928) ; v1(23.495,31.369) 23.638,31.226 U2.10
RSTN: J2.6 Q3.C U2.8 | length 72.1
  Top Layer w0.2: v1(22.606,30.099) 22.606,38.354 v1(22.987,38.735) ; v1(27.813,38.735) 28.321,38.227 28.321,29.591 30.182,27.73 30.182,23.92 31.496,22.606 v1(33.02,22.606) ; v1(33.02,18.288) 35.654,15.654 J2.6
  Bottom Layer w0.2: Q3.C -2.667,38.989 -2.346,38.668 22.92,38.668 v1(22.987,38.735) v1(27.813,38.735) ; 22.098,29.21 22.098,28.972 22.114,28.956 ; v1(22.606,30.099) 22.114,29.607 22.114,28.956 ; U2.8 22.228,27.943 22.114,28.057 22.114,28.956 ; v1(33.02,18.288) v1(33.02,22.606)
RX2/SETKEY: J4.1 J7.2 U2.21 | length 80.3
  Top Layer w0.2: J4.1 19.013,73.697 v1(25.654,67.056) 26.543,66.167 26.543,42.672 28.75,40.465 28.75,29.718 30.734,27.734 v1(30.734,24.384)
  Bottom Layer w0.2: J7.2 11.06,68.718 11.938,69.596 16.764,69.596 19.304,67.056 v1(25.654,67.056) ; U2.21 27.613,26.343 29.572,24.384 v1(30.734,24.384)
SCL: J6.7 U2.25 UB1.6 | length 35
  Top Layer w0.2: v1@21.971,24.384 v1(26.924,24.384)
  Bottom Layer w0.2: J6.7 0.339,19.125 3.312,22.098 6.731,22.098 7.239,22.606 UB1.6 10.541,22.606 11.049,22.098 11.049,21.59 12.446,20.193 16.51,20.193 17.78,21.463 19.431,21.463 21.971,24.003 v1(21.971,24.257) ; U2.25 26.765,24.543 v1(26.924,24.384)
SDA: J6.6 U2.26 UB1.5 | length 34.6
  Top Layer w0.2: v1(21.971,22.86) 22.733,23.622 v1(26.543,23.622)
  Bottom Layer w0.2: J6.6 -0.412,17.876 3.048,21.336 UB1.5 9.007,21.336 10.531,19.812 16.764,19.812 17.907,20.955 19.939,20.955 20.657,21.673 20.657,22.054 21.463,22.86 v1(21.971,22.86) ; U2.26 25.638,23.892 25.908,23.622 v1(26.543,23.622)
TX2: J4.2 U2.20 | length 87.2
  Top Layer w0.2: J4.2 21.553,79.121 21.842,79.41 36.758,79.41 37.655,78.513 37.655,34.099 v3(36.322,32.766) ; v3(28.829,26.035) 29.591,25.273 29.591,23.622 31.496,21.717 34.417,21.717 35.052,22.352 35.052,27.051 v3(35.433,27.432)
  Bottom Layer w0.2: U2.20 28.121,26.743 v3(28.829,26.035) ; v3(35.433,27.432) 36.322,28.321 v3(36.322,32.766)
UART_RD: J3.5 Q2.S R16.1 | length 15.6
  Bottom Layer w0.2: R16.1 2.972,13.005 2.54,12.573 Q2.S 2.601,11.557 5.842,11.557 7.112,10.287 9.906,10.287 11.188,11.569 J3.5
UART_RD1: Q2.D R4.1 | length 31
  Top Layer w0.2: v1(5.461,10.541) 7.112,10.541 10.795,14.224 27.432,14.224 v1(31.496,18.288)
  Bottom Layer w0.2: Q2.D 5.334,10.668 v1(5.461,10.541) ; v1(31.496,18.288) 31.572,18.364 R4.1
UART_TD: J3.4 Q1.S R13.1 | length 12.5
  Bottom Layer w0.2: R13.1 2.921,18.999 2.921,17.46 Q1.S 10.988,17.206 11.688,16.506 J3.4
UART_TD1: Q1.D R3.1 | length 31.8
  Top Layer w0.2: v1(5.715,16.129) 10.541,16.129 10.922,15.748 27.813,15.748 31.115,19.05 31.877,19.05 32.258,18.669 v1(32.258,16.891)
  Bottom Layer w0.2: Q1.D 5.588,16.256 v1(5.715,16.129) ; R3.1 31.699,16.891 v1(32.258,16.891)
V6V: J3.3 Q4.D R5.2 R9.1 R10.1 R11.1 R12.1 R14.1 R15.1 R17.1 R18.1 R19.1 R20.1 R21.1 R22.1 | length 225
  Top Layer w0.2: v1(12.192,17.653) 12.192,25.273 15.443,28.524 15.443,31.699
  Top Layer w0.6: R20.1 -2.21,31.699 -1.651,32.258 -1.651,46.228 ; R17.1 -1.702,46.177 -1.651,46.228 ; R12.1 -1.727,61.036 -1.651,60.96 ; R9.1 -1.981,75.26 -1.651,74.93 v1(-1.651,71.882) -1.651,60.96 ; R21.1 15.443,31.699 17.018,33.274 v1@17.018,46.101 ; R18.1 16.942,46.177 v1@17.018,46.101 ; R14.1 16.942,61.036 17.018,60.96 ; R10.1 16.18,75.26 17.018,74.422 v1(17.018,72.136) 17.018,60.96 ; R22.1 33.096,31.699 34.163,32.766 v1(34.163,46.101) ; R19.1 34.087,46.177 v1(34.163,46.101) ; R15.1 34.087,61.036 34.163,60.96 ; R11.1 33.325,75.26 34.163,74.422 34.163,60.96 ; -1.651,46.228 -1.651,60.96 ; v1@17.018,46.101 v1(17.018,46.177) 17.018,60.96 ; v1(34.163,46.101) 34.163,60.96
  Bottom Layer w0.2: J3.3 12.188,17.649 v1(12.192,17.653)
  Bottom Layer w0.6: v1(-1.651,71.882) 16.764,71.882 v1(17.018,72.136) ; Q4.D 8.255,45.466 8.966,46.177 v1(17.018,46.177) 19.482,46.177 22.352,43.307 24.257,43.307 ; R5.2 24.308,43.358 24.257,43.307 ; v1(34.163,46.101) 34.163,43.815 33.655,43.307 24.257,43.307
VBAT: C9.1 C10.1 C25.1 C26.1 D1.2 J7.4 Q4.S R1.1 R27.1 U1.4 U3.3 | length 77.9
  Top Layer w0.4: v1(2.921,33.655) 2.921,41.021 v1(3.683,41.783)
  Bottom Layer w0.4: C25.1 C25.1@-1.448,45.847 ; C26.1 C25.1@-1.448,45.847 ; 1.778,45.72 1.778,42.545 2.54,41.783 v1(3.683,41.783) R27.1 ; C10.1 C9.1 4.369,32.461 4.124,32.706 U1.4 ; v1(2.921,33.655) U1.4 ; Q4.S 2.474,46.416 1.905,45.847 -0.61,45.847 C25.1@-1.448,45.847 ; J7.4 15.06,64.971 13.208,63.119 7.62,63.119 4.878,60.377 U3.3 4.878,57.202 2.286,54.61 D1.2 -0.032,54.483 -0.032,48.355 -1.448,46.939 C25.1@-1.448,45.847 ; R1.1 17.375,34.798 13.081,34.798 11.176,32.893 6.477,32.893 5.715,33.655 U1.4
VBUS: C24.1 D1.1 J5.2 RW1.1 | length 21.7
  Bottom Layer w0.4: C24.1 RW1.1 -9.601,45.136 -8.636,46.101 -8.636,48.895 -5.842,51.689 -4.953,51.689 -3.905,52.737 D1.1 -5.969,54.61 -7.269,53.31 J5.2
VDD: C2.2 C11.2 C13.2 C14.2 C20.2 L2.1 U2.1 U2.22 U2.31 | length 56
  Top Layer w0.2: v1(19.939,30.48) 19.685,30.226 v1(19.685,23.239) 14.986,18.54 14.986,17.907 15.367,17.526 17.018,17.526 19.431,19.939 v1(24.892,19.939) 25.4,20.447 v1(30.099,20.447)
  Bottom Layer w0.2: C11.2 v1(19.685,23.239) 21.589,25.143 U2.1 ; v1(19.939,30.48) 19.939,32.004 20.511,32.575 22.415,32.575 22.682,32.842 C20.2 L2.1 ; U2.31 23.638,22.26 C2.2 24.892,20.904 v1(24.892,19.939) ; U2.22 27.514,25.943 30.15,23.308 C14.2 C13.2 30.15,20.498 v1(30.099,20.447)
VDD3V3: J6.5 Q1.G Q2.G Q5.D R13.2 R16.2 R23.1 TLED1.1 | length 132
  Top Layer w0.6: v1(-0.381,16.51) 0.762,16.51 ; v1(0.762,15.113) 0.762,16.51 ; v1(2.159,73.279) v1(2.159,57.785) 2.159,51.816 ; v1(5.207,19.05) 0.762,19.05 ; v1(6.985,50.927) 6.096,51.816 2.159,51.816 ; 0.762,16.51 0.762,19.05 ; 0.762,19.05 0.762,23.241 2.159,24.638 2.159,51.816
  Bottom Layer w0.6: R23.1 -11.379,58.115 -10.922,57.658 2.032,57.658 v1(2.159,57.785) ; J6.5 -0.497,16.626 v1(-0.381,16.51) ; v1(2.159,73.279) 12.065,83.185 TLED1.1 ; Q2.G 1.585,9.718 0.762,10.541 v1(0.762,15.113) 0.955,15.306 Q1.G 3.363,15.306 4.394,14.275 R16.2 ; R13.2 v1(5.207,19.05) ; Q5.D 6.817,50.759 v1(6.985,50.927)
pads on no net: ANT1.2 ANT1.3 ANT1.4 J1.A J1.B J3.7 J3.8 J5.3 J5.4 J6.9 J6.10 U1. U1.1 U2.0 U2.9 U2.12 U2.13 UB1. UB1.3 UB1.7 Y1.3

## Polygon pours and split planes (outlines as drawn)
GND on Top Layer "Top Layer-No Net" (solid, remove dead copper, pour order 4): 32.321,8.78 32.321,13.225 31.432,14.114 31.051,14.114 16.7,14.114 16.319,13.733 16.065,13.479 16.065,13.098 16.065,0.525 7.937,0.525 -7.557,0.525 -7.564,0.532 -7.564,7.129 -7.564,19.705 -14.504,26.645 -14.504,32.91 -14.504,81.843 -5.017,91.33 -0.953,95.394 -0.953,102.887 -0.953,104.284 -0.318,104.919 5.143,104.919 23.685,104.919 25.463,103.141 25.336,103.014 25.336,98.696 25.336,95.01 38.496,81.85 38.496,8.752 32.349,8.752 32.321,8.78
GND on Bottom Layer "Top Layer-No Net" (solid, remove dead copper, pour order 3): 32.292,8.009 32.292,12.454 31.403,13.343 31.022,13.343 16.671,13.343 16.29,12.962 16.036,12.708 16.036,12.327 16.036,-0.246 7.908,-0.246 -7.586,-0.246 -7.593,-0.239 -7.593,6.358 -7.593,18.933 -14.533,25.873 -14.533,32.139 -14.533,81.072 -5.046,90.559 -0.982,94.623 -0.982,102.116 -0.982,103.513 -0.347,104.148 5.114,104.148 23.656,104.148 25.434,102.37 25.307,102.243 25.307,97.925 25.307,94.238 38.467,81.078 38.467,7.981 32.32,7.981 32.292,8.009

## Keep-outs
Keep-Out Layer:
  circle w0.127: c2.873,2.9 r1.6
  circle w0.127: c1.71,85.1 r1.6
  circle w0.127: c21.247,2.9 r1.6
  circle w0.127: c22.41,85.1 r1.6
  lines w0.127: -14.44,26.12 -8.44,26.12 cw(c-8.47,25.15) -7.5,25.12 -7.5,5.727 -2,5.727 cw(c-2,3.727) 0,3.727 0,0 24.02,0 24.02,3.727 cw(c26.02,3.727) 26.02,5.727 30.62,5.727 ccw(c30.62,6.727) 31.62,6.727 31.62,7.227 cw(c32.62,7.227) 32.62,8.227 38.56,8.227 38.56,81.325 35.01,81.325 cw(c35.01,85.825) 31.929,82.544 ccw(c28.506,78.9) 28.506,83.9 28.01,83.9 cw(c28.01,86.9) 25.01,86.9 25.01,102 ccw(c23.01,102) 23.01,104 1.11,104 ccw(c1.11,102) -0.89,102 -0.89,86.9 cw(c-3.89,86.9) -3.89,83.9 -4.386,83.9 ccw(c-4.386,78.9) -7.809,82.544 cw(c-10.89,85.825) -10.89,81.325 -14.44,81.325 -14.44,26.12
  lines w0.152: -16.94,0 -0.94,0 ; -16.94,104 -1.89,104 ; -14.44,-3.073 -14.44,25.12 ; 38.56,-3.073 38.56,7.227
  lines w0.254: -18.448,1.524 -17.94,0 ; -18.448,102.476 -17.94,104 ; -18.194,0 -17.686,0 ; -18.194,104 -17.686,104 ; -17.94,46.261 -17.94,0 ; -17.94,57.739 -17.94,104 ; -17.432,1.524 -17.94,0 ; -17.432,102.476 -17.94,104 ; -14.44,-4.327 -14.44,-3.819 ; -12.916,-4.581 -14.44,-4.073 ; -12.916,-3.565 -14.44,-4.073 ; 6.956,-4.073 -14.44,-4.073 ; 17.164,-4.073 38.56,-4.073 ; 37.036,-4.581 38.56,-4.073 ; 37.036,-3.565 38.56,-4.073 ; 38.56,-4.327 38.56,-3.819
  text "104 (mm)" at -17.026,46.515 h1.52 r90
  text "53 (mm)" at 7.21,-4.987 h1.52

## Silkscreen, mask and mechanical layers (free items; w line width, h text height)
Top Overlay:
  circle w0.127: c2.873,2.899 r2.5
  circle w0.127: c21.172,2.899 r2.5
  circle w0.127: c1.71,85.1 r2.5
  circle w0.127: c22.41,85.1 r2.5
  text "G" at 6.345,99.675 h0.8
  text "R" at 17.14,99.675 h0.8
Bottom Overlay:
  circle w0.127: c2.873,2.9 r2.6
  circle w0.127: c21.247,2.9 r2.6
  circle w0.127: c1.71,85.1 r2.6
  circle w0.127: c22.41,85.1 r2.6
  text "S1-MAIN-V1.2" at 10.795,79.756 h0.8
  text "2020-8-12" at 9.525,77.597 h0.8
  text "TX" at 22.479,75.184 h0.8 r90
  text "GND" at 25.019,75.184 h0.8 r90
  text "RX" at 19.685,74.93 h0.8 r90
  text "GND" at 8.509,71.12 h0.8 r270
  text "SET" at 10.541,71.12 h0.8 r270
  text "BELL" at 12.827,71.12 h0.8 r270
  text "VBAT" at 14.605,70.993 h0.8 r270
  text "+" at 37.46,46.335 h0.8
  text "-" at -6.355,26.904 h0.8
  text "M3V3" at 35.433,25.527 h0.8
  text "IRQ" at 35.433,23.495 h0.8
  text "SET" at 35.433,21.463 h0.8
  text "P07" at 35.306,19.177 h0.8
  text "P06" at 35.306,17.272 h0.8
  text "3V3" at 14.219,16.617 h0.8 r270
  text "GND" at 8.636,16.51 h0.8 r270
  text "RD" at 9.779,16.51 h0.8 r270
  text "TD" at 10.922,16.51 h0.8 r270
  text "VDD" at 11.938,16.51 h0.8 r270
  text "OUT" at 12.954,16.51 h0.8 r270
  text "RSNT" at 35.306,15.24 h0.8
  text "GND" at 35.306,13.208 h0.8
Mechanical 13:
  lines w0.1: 1.577,126.28 1.577,126.48 ; 2.177,126.18 1.577,126.38 ; 2.177,126.58 1.577,126.38 ; 2.673,126.38 1.577,126.38 ; 6.48,126.38 7.577,126.38 ; 6.977,126.18 7.577,126.38 ; 6.977,126.58 7.577,126.38 ; 7.577,126.28 7.577,126.48 ; 30.377,122.38 30.577,121.78 ; 30.377,127.18 30.577,127.78 ; 30.477,121.78 30.677,121.78 ; 30.477,127.78 30.677,127.78 ; 30.577,122.877 30.577,121.78 ; 30.577,126.683 30.577,127.78 ; 30.777,122.38 30.577,121.78 ; 30.777,127.18 30.577,127.78
  lines w0.152: 1.567,127.78 29.577,127.78
  text "6 (mm)" at 2.927,125.98 h0.6
  text "6 (mm)" at 30.977,123.131 h0.6 r90